# Altium PCB PCB.PcbDoc (part 6 of 6)
Units mm, origin at the board's own origin, x right, y up, seen from the top; angles counter-clockwise.
Board outline 190 x 64 mm, 6 copper layers (SIG 1, GND 1, SIG 2, PWR, GND 2, SIG 3), stack 1.565 mm thick; 489 components, 387 nets, 1828 pads, 1817 vias.
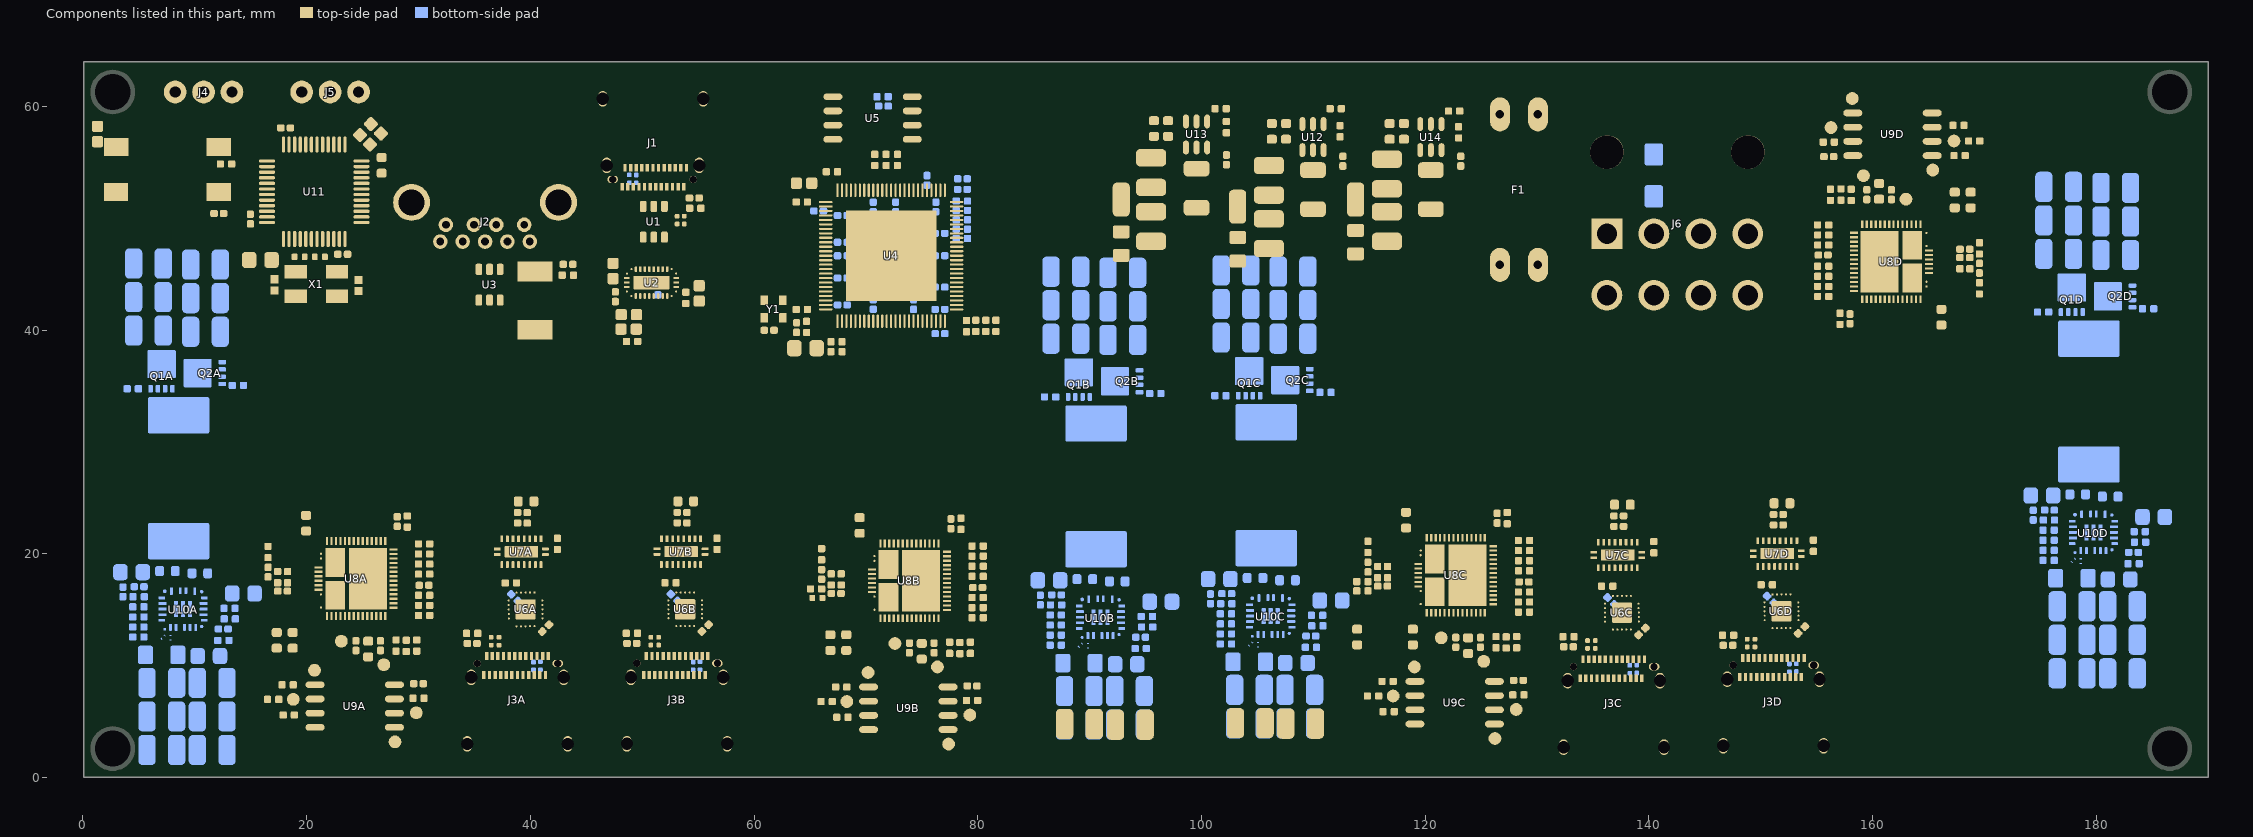
[diagram p10: the components of this part, seen from the top]

## Polygon pours and split planes (outlines as drawn) (continued)
P3V3 on SIG 1 "P3V3_L01_P251" (solid, pour order 251): 136.605,24.855 136.53,24.78 136.53,22.255 136.855,21.905 136.855,20.755 137.105,20.755 137.105,21.905 137.255,22.18 137.255,23.705 137.38,23.83 137.38,24.78 137.305,24.855
P3V3 on SIG 1 "P3V3_L01_P242" (solid, pour order 242): 52.827,25.182 52.752,25.107 52.752,22.582 53.077,22.232 53.077,21.082 53.327,21.082 53.327,22.232 53.477,22.507 53.477,24.032 53.602,24.157 53.602,25.107 53.527,25.182
P3V3 on SIG 1 "P3V3_L01_P324" (solid, pour order 324): 150.175,15.983 149.725,16.958 149.725,17.483 150.35,17.483 150.623,16.737 151.143,16.737 151.143,15.983
CHASSIS on SIG 1 "CHASSIS_L01_P255" (solid, pour order 255): 147.06,12.946 146.809,13.164 146.386,13.164 146.168,12.946 146.168,8.628 146.767,8.029 147.212,8.029 147.488,8.305 147.488,9.387 147.06,10.004
NetR76_2 on SIG 1 "NETR76_2_L01_P317" (solid, pour order 317): 121.241,60.2 122.341,60.2 122.45,60.091 122.45,59.175 122.725,58.9 123.341,58.9 123.441,58.8 123.441,57.9 123.341,57.8 121.241,57.8 121.141,57.9 121.141,60.1
NetR70_2 on SIG 1 "NETR70_2_L01_P309" (solid, pour order 309): 110.7,60.2 111.8,60.2 111.909,60.091 111.909,59.175 112.184,58.9 112.8,58.9 112.9,58.8 112.9,57.9 112.8,57.8 110.7,57.8 110.6,57.9 110.6,60.1
C_CC2C on SIG 1 "C_CC2C_L01_P308" (solid, pour order 308): 138.38,16.63 138.38,16.53 139.38,15.53 139.48,15.53 139.48,15.955 138.805,16.63
P3V3 on SIG 1 "P3V3_L01_P306" (solid, pour order 306): 135.905,15.855 135.455,16.83 135.455,17.355 136.08,17.355 136.354,16.609 136.873,16.609 136.873,15.855
C_CC2B on SIG 1 "C_CC2B_L01_P275" (solid, pour order 275): 54.625,16.933 54.625,16.833 55.625,15.833 55.725,15.833 55.725,16.258 55.05,16.933
C_CC2A on SIG 1 "C_CC2A_L01_P272" (solid, pour order 272): 40.35,16.925 40.35,16.825 41.35,15.825 41.45,15.825 41.45,16.25 40.775,16.925
P3V3 on SIG 1 "P3V3_L01_P274" (solid, pour order 274): 52.15,16.158 51.7,17.133 51.7,17.658 52.325,17.658 52.598,16.912 53.118,16.912 53.118,16.158
P5V0_UFP on SIG 1 "P5V0_UFP_L01_P273" (solid, pour order 273): 67.275,38.3 67.275,37.775 67.15,37.65 64.925,37.65 64.8,37.775 64.8,38.925 65.05,39.175 66.05,39.175 66.25,38.975 66.25,38.45 67.125,38.45
P3V3 on SIG 1 "P3V3_L01_P259" (solid, pour order 259): 37.875,16.15 37.425,17.125 37.425,17.65 38.05,17.65 38.323,16.904 38.843,16.904 38.843,16.15
P3V3 on SIG 1 "P3V3_L01_P243" (solid, pour order 243): 38.575,25.15 38.5,25.075 38.5,22.55 38.825,22.2 38.825,21.05 39.075,21.05 39.075,22.2 39.225,22.475 39.225,24 39.35,24.125 39.35,25.075 39.275,25.15
GND on SIG 1 "GND_L01_P271" (solid, pour order 271): 38.675,13.2 38.75,13.125 39.6,13.125 39.675,13.2 39.675,14.75 38.675,14.75
NetC92_2 on SIG 1 "NETC92_2_L01_P270" (solid, pour order 270): 121.005,57.024 121.005,55.627 121.451,55.181 123.601,55.181 123.601,56.002 123.519,56.084 122.155,56.084 122.155,56.869 121.952,57.073 121.009,57.073
NetC82_2 on SIG 1 "NETC82_2_L01_P269" (solid, pour order 269): 110.5,56.7 110.5,55.591 110.9,55.2 113.1,55.2 113.1,56 113,56.1 112,56.1 111.6,56.5 111.6,56.7 111.5,56.8 110.6,56.8
NetC87_2 on SIG 1 "NETC87_2_L01_P261" (solid, pour order 261): 100.05,57.151 100.05,55.754 100.496,55.308 102.646,55.308 102.646,56.129 102.564,56.211 101.2,56.211 101.2,56.996 100.997,57.2 100.054,57.2
CHASSIS on SIG 2 "CHASSIS_L03_P353" (solid, pour order 353): 21 vertices, not listed, extent 146.288,2.041 156.038,9.491
CHASSIS on SIG 2 "CHASSIS_L03_P352" (solid, pour order 352): 21 vertices, not listed, extent 132.018,1.913 141.768,9.363
CHASSIS on SIG 2 "CHASSIS_L03_P300" (solid, pour order 300): 21 vertices, not listed, extent 48.263,2.216 58.013,9.666
CHASSIS on SIG 2 "CHASSIS_L03_P299" (solid, pour order 299): 21 vertices, not listed, extent 33.988,2.208 43.738,9.658
CHASSIS on SIG 2 "CHASSIS_L03_P256" (solid, pour order 256): 21 vertices, not listed, extent 46.075,54.05 55.825,61.5
GND on GND 2 "GND_L05_P254" (solid, pour order 254): 190.05,64.03 190.05,0.03 0.05,0.03 0.05,64.03 190.05,64.03
GND on GND 1 "GND_L02_P325" (solid, pour order 325): 190.05,64.03 190.05,0.03 0.05,0.03 0.05,64.03

## Silkscreen, mask and mechanical layers (free items; w line width, h text height)
Top Overlay:
  drawing of 18 lines, arcs and shapes, not listed
  text "J-Link" at 19.997,58.241 h1.52
  text "UART" at 11.825,58.141 h1.52
  text "BOOT / RESET" at 5.7,48.05 h1.52
  text "35A Fuse" at 125.65,40.917 h1.52
  text "DFP 5" at 30.654,39.429 h1.52
  text "UFP 1" at 46.979,36.504 h1.52
  text "DC 12V IN /  / !! FOR 24V / REMOVE D1 & USE 20A FUSE" at 132.675,36.45 h1.52
  text "DFP 2" at 50.429,26.762 h1.52
  text "DFP 1" at 36.154,26.754 h1.52
  text "DFP 4" at 148.454,26.587 h1.52
  text "DFP 3" at 134.184,26.459 h1.52
  text "Zach Brown, / Toby Cowles,  / Carter Graefnitz /  / High Speed High Power USB Hub / ECSE 398 Senior Project / 2024" at 159.1,3.275 h1.52